# Altium PCB MINI-STM32.PcbDoc
Units mm, origin at the board's own origin, x right, y up, seen from the top; angles counter-clockwise.
Board outline 56.51 x 62.3 mm, 2 copper layers (Top Layer, Bottom Layer); 57 components, 64 nets, 295 pads, 204 vias.
Unrouted connection lines stored in the file: 1.
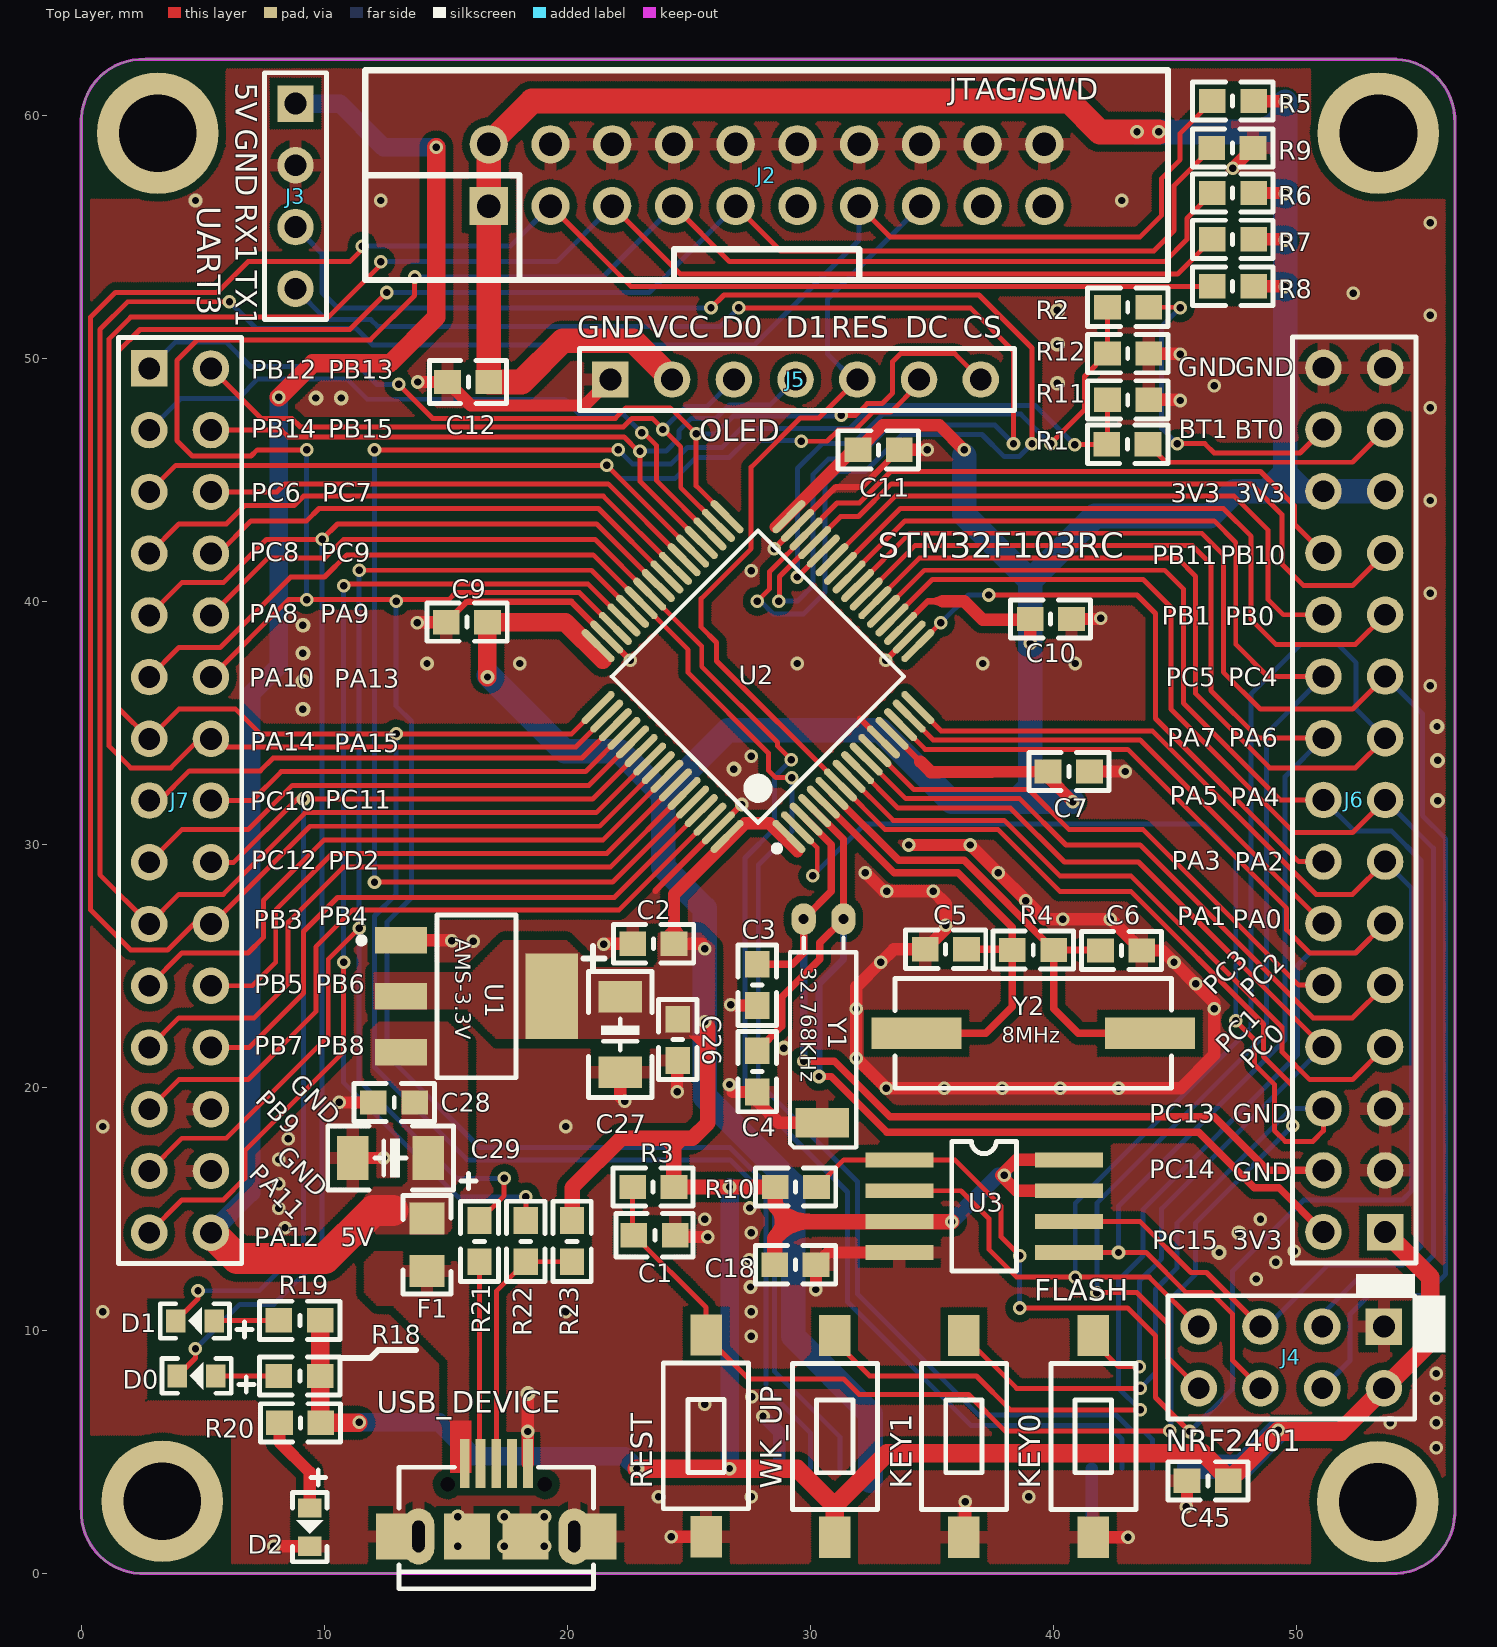
[diagram p0: Top Layer view]
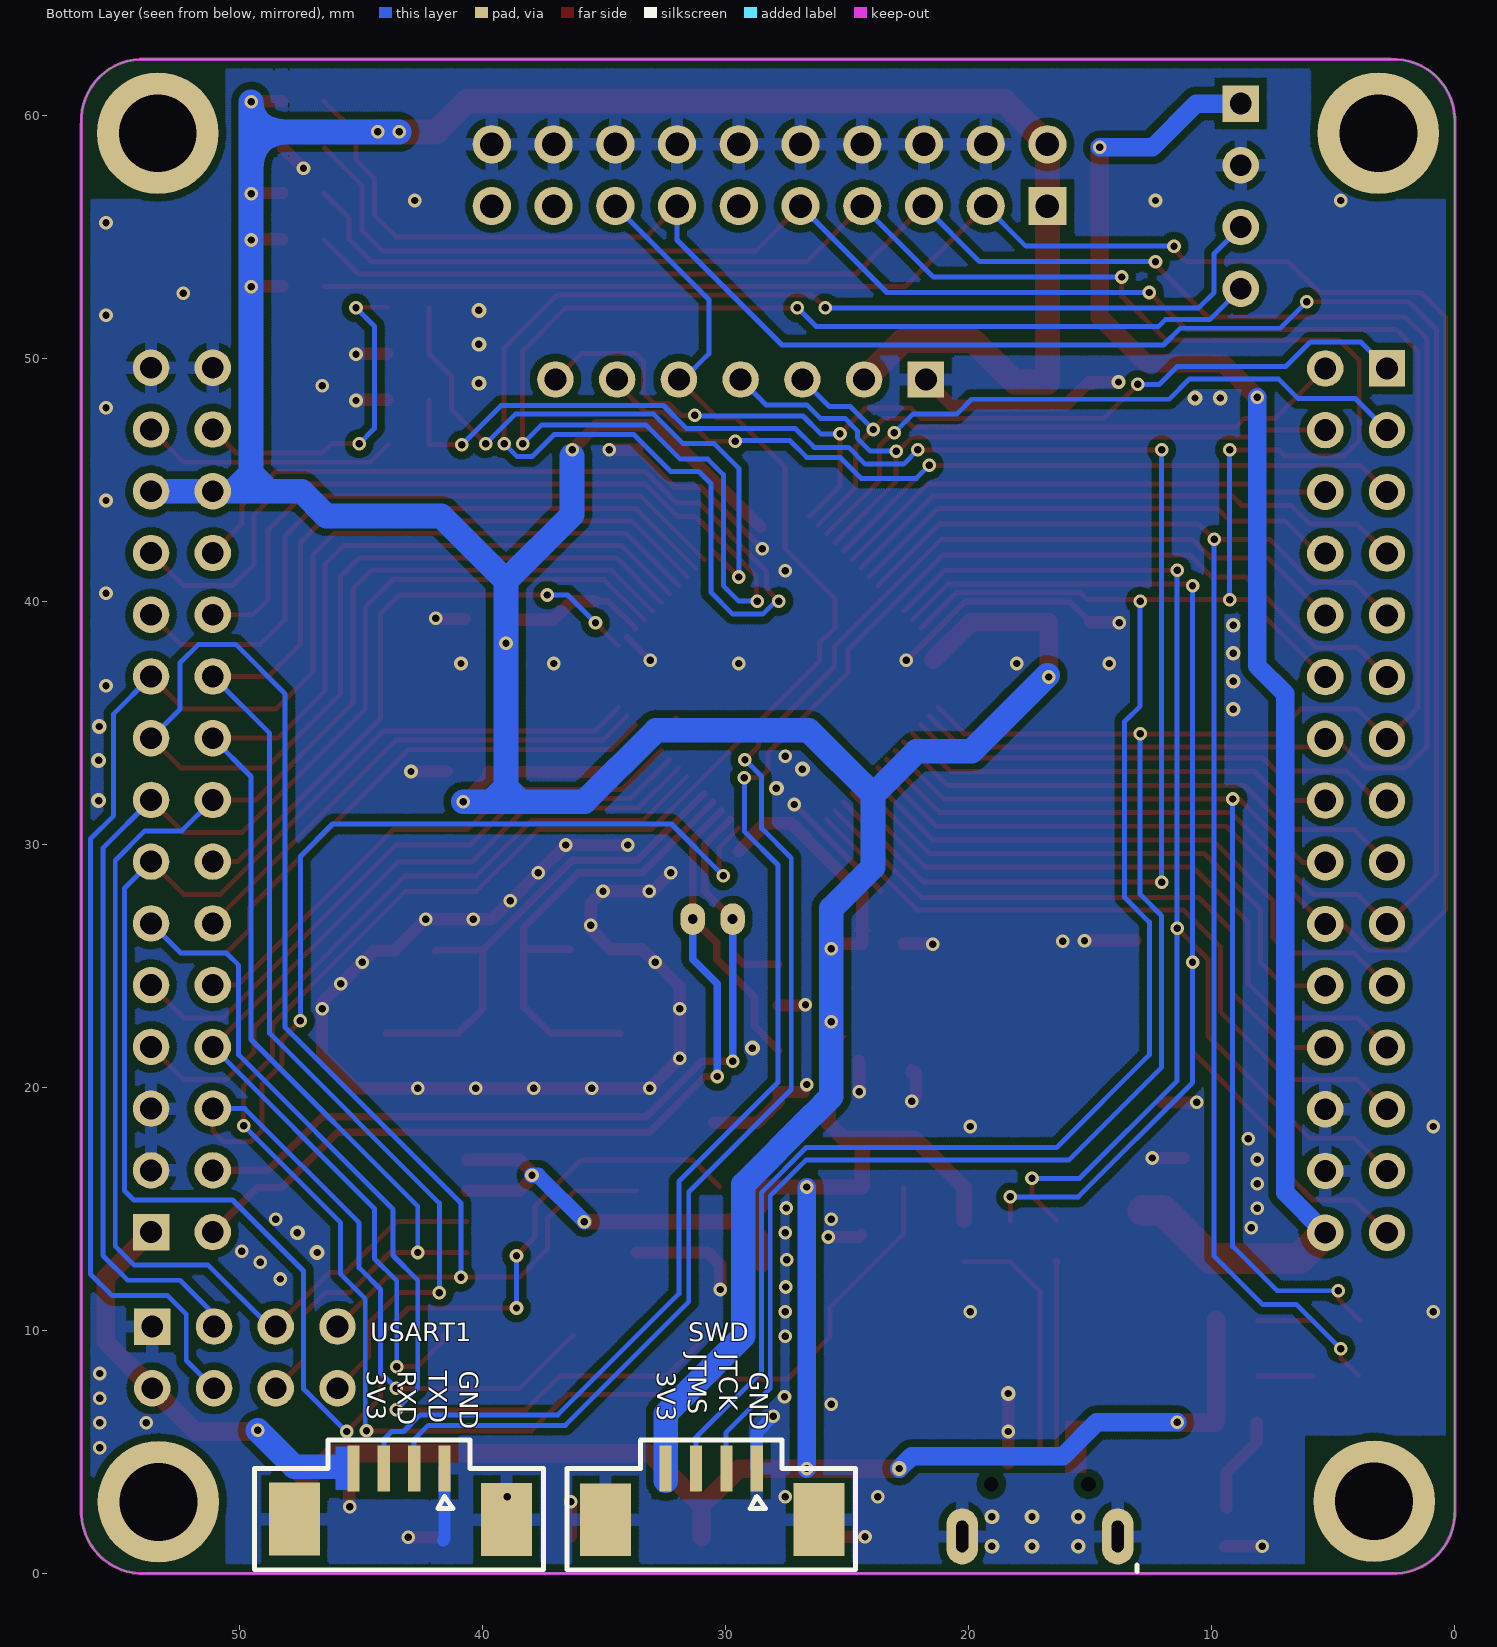
[diagram p1: Bottom Layer view, seen from below]

## Layer stack, top to bottom
Top Solder: solder mask 0.0102, Solder Resist, Dk 3.5
Top Layer: signal copper 0.0356
Dielectric1: core 0.32, FR-4, Dk 4.8
Bottom Layer: signal copper 0.0356
Bottom Solder: solder mask 0.0102, Solder Resist, Dk 3.5

## Board outline
0.004,2.635 ccw(c2.526,2.522) 2.413,0 53.873,0 ccw(c53.986,2.522) 56.508,2.409 56.515,2.409 56.515,59.664 56.511,59.664 ccw(c53.989,59.777) 54.102,62.298 2.642,62.298 ccw(c2.529,59.777) 0.007,59.889 0,59.889

## Design rules (kind name [scope] priority, off if disabled: settings)
Clearance Clearance_1 [InPoly] p1: gap=0.305 ignorepadtopadclearanceinfootprint=FALSE except(0: Arc-Hole Track-Hole SMDPad-Hole THPad-Hole Via-Hole Fill-Hole Poly-Hole Region-Hole Text-Hole)
Clearance [All] p2: gap=0.152 ignorepadtopadclearanceinfootprint=FALSE except(0: Arc-Hole Track-Hole SMDPad-Hole THPad-Hole Via-Hole Fill-Hole Poly-Hole Region-Hole Text-Hole)
ComponentClearance [All] p1: gap=0.025 collisioncheckmode=3 verticalgap=0.025 showdistances=FALSE
FabricationTestpoint [(IsPad And (OnTopLayer Or OnBottomLayer))] p1: side=3 testpointundercomponent=TRUE minsize=1.016 maxsize=2.54 preferedsize=1.524 minholesize=0 maxholesize=1.016 preferedholesize=0.813 testpointgrid=0.025 allowsidetop=TRUE allowsidebottom=TRUE usegrid=TRUE gridtolerance=0
MinimumSolderMaskSliver [All] p1: minsoldermaskwidth=0.025
PlaneConnect [All] p1: planeconnectstyle=Relief reliefexpansion=0.254 reliefentries=4 reliefconductorwidth=0.254 reliefairgap=0.254
PolygonConnect PolygonConnect_1 [isvia] p1: connectstyle=Direct reliefconductorwidth=0.254 reliefentries=4 polygonreliefangle="90 Angle" airgapwidth=0.254
PolygonConnect [All] p2: connectstyle=Relief reliefconductorwidth=0.508 reliefentries=4 polygonreliefangle="90 Angle" airgapwidth=0.254
RoutingVias [All] p1: holewidth=0.305 width=0.559 viastyle="Through Hole" minholewidth=0.305 minwidth=0.559 maxholewidth=0.305 maxwidth=0.559
SilkToSilkClearance [All] p1: silktosilkclearance=0.025
SilkToSolderMaskClearance SilkscreenOverComponentPads [IsPad] p1: minsilkscreentomaskgap=0.025 clearancetoexposedcopper=TRUE
SolderMaskExpansion [All] p1: expansion=0.064 istentingtop=FALSE
Width Width_2 [InNet('VCC3.3')  and InNet('VCC5')] p1: maxlimit=1.27 minlimit=0.254 preferedwidth=0.508
Width Width_1 [InNet('GND')] p2: maxlimit=0.508 minlimit=0.254 preferedwidth=0.508
Width [All] p3: maxlimit=1.524 minlimit=0.203 preferedwidth=0.203
24 further rules are at their usual default settings.

## Components (designator, comment, footprint, x,y, rotation, side; value= is the part's Value field where it differs from the comment)
C1 "104" 0603C 24.434,13.919 r180 top
C2 "104" 0603J 22.659,25.933 r0 top
C3 "12pF" 0603J 27.838,25.093 r270 top
C4 "12pF" 0603J 27.838,21.537 r270 top
C5 "20pF" 0603J 36.449,25.654 r180 top
C6 "20pF" 0603J 41.91,25.654 r0 top
C7 "104" 0603J 39.751,33.02 r0 top
C9 "104" 0603J 14.986,39.167 r0 top
C10 "104" 0603J 40.767,39.243 r180 top
C11 "104" 0603J 33.68,46.203 r180 top
C12 "104" 0603C 16.764,49.022 r180 top
C18 "104" 0603J 28.501,12.725 r0 top
C26 "104" 0603J 24.511,21.082 r90 top
C27 "106" TAC_3216 22.174,22.175 r270 top
C28 "104" 0603J 11.989,19.406 r0 top
C29 "106" TAC_3216 12.725,17.094 r180 top
C45 "104" 0603J 45.468,3.835 r0 top
D0 "DS0" LED_0603(B) 4.747,8.128 r180 top
D1 "DS1" LED_0603(B) 4.674,10.389 r180 top
D2 "PWR" LED_0603(B) 9.398,1.905 r270 top
F1 "500mA" RC0805 14.224,14.605 r270 top
J2 "10X2H" IDC20 16.764,56.261 r0 top
J3 "Header 4" HDR1X4 8.814,60.477 r270 top
J4 "NRF2401" HDR2X4 53.594,10.16 r180 top
J5 "OLED" HDR1X7 21.768,49.124 r0 top
J6 "Header 15X2" IDE15X2_2.54 53.645,14.046 r90 top
J7 "Header 15X2" IDE15X2_2.54 2.794,49.581 r270 top
KEY0 "SW-PB" "micro button_2_SMD" 41.631,5.639 r90 top
KEY1 "SW-PB" "micro button_2_SMD" 36.314,5.639 r90 top
R1 "510R" 0603J 42.164,46.482 r0 top
R2 "510R" 0603J 43.942,52.07 r180 top
R3 "10K" 0603J 24.409,15.875 r180 top
R4 "1M" 0603J 38.28,25.679 r0 top
R5 "10K" 0603J 48.26,60.554 r180 top
R6 "10K" 0603J 48.26,56.769 r180 top
R7 "10K" 0603J 48.26,54.864 r180 top
R8 "10K" 0603J 48.26,52.934 r180 top
R9 "10K" 0603J 46.482,58.674 r0 top
R10 "10K" 0603J 30.279,15.875 r180 top
R11 "10K" 0603J 43.942,48.26 r180 top
R12 "10K" 0603J 43.942,50.165 r180 top
R18 "510R" 0603J 8.103,8.153 r0 top
R19 "510R" 0603J 8.103,10.439 r0 top
R20 "510R" 0603J 8.128,6.223 r0 top
R21 "22R" 0603J 16.408,14.552 r270 top
R22 "22R" 0603J 18.313,14.552 r270 top
R23 "1.5K" 0603J 20.218,14.552 r270 top
REST "" "micro button_2_SMD" 25.705,5.664 r270 top
SWD "Comment" 1.25PWT-4P#1 28.722,4.318 r0 bottom
U1 "AMS1117-3.3" SOT223 16.256,23.749 r270 top
U2 "STM32F103RCT6" LQFP64 29.113,30.325 r135 top
U3 "W25X16" SOIC8P 34.163,17.018 r270 top
USART1 "Comment" 1.25PWT-4P#2 41.569,4.318 r0 bottom
USB_DEVICE "Comment" MicroUSB 17.075,-0.307 r180 top
WK_UP "WK_UP" "micro button_2_SMD" 30.996,5.639 r90 top
Y1 "32.768k" 32.768k 31.358,26.924 r180 top
Y2 "8MHz" smt-xtal 34.417,22.225 r0 top

## Footprints (in the part's own frame and the unit in brackets; to place one, negate y for a bottom-side part, rotate by r counter-clockwise, add the part's x,y. Pads: shape width x height; smd on the part's side, far side on the other; paste and mask are expansions set on the pad)
1.25PWT-4P#1 [mm]
  rect 2.1x3 smd: 0(-2.55,2.1) 0(6.228,2.108)
  rect 0.5x1.905 smd: 1(0,0) 2(1.25,0) 3(2.5,0) 4(3.75,0)
  silkscreen extent -4.06,-1.17 7.81,4.17, body extent -3.14,-0.74 7.01,3.86, height 3.43
1.25PWT-4P#2 [mm]
  rect 2.1x3 smd: 0(-2.55,2.1) 0(6.183,2.083)
  rect 0.5x1.905 smd: 1(0,0) 2(1.25,0) 3(2.5,0) 4(3.75,0)
  silkscreen extent -4.06,-1.17 7.81,4.17, body extent -3.14,-0.74 7.01,3.86, height 3.43
32.768k [mm]
  oval 1x1.3 hole 0.4: 1(0,0) 2(1.64,0)
  rect 2.2x1.2 smd: 3(0.875,8.382)
  silkscreen extent -0.53,0.76 2.2,9.4
0603C [mm] "for capicty only"
  rect 1.1x1 smd: 1(0,0) 2(1.7,0)
  silkscreen extent -0.74,-0.89 2.44,0.89
0603J [mm]
  rect 1.1x1 smd: 1(1.725,-0.025) 2(0.025,-0.025)
  silkscreen extent -0.76,-0.81 2.54,0.76
HDR1X4 [mm] "Connector; Header; 4 Position"
  rect 1.5x1.5 hole 0.9: 1(0,0)
  round 1.5 hole 0.9: 2(2.54,0) 3(5.08,0) 4(7.62,0)
  silkscreen extent -1.27,-1.27 8.89,1.27
HDR1X7 [mm] "Connector; Header; 8 Position"
  rect 1.5x1.5 hole 0.9: 1(0,0)
  round 1.5 hole 0.9: 2(2.54,0) 3(5.08,0) 4(7.62,0) 5(10.16,0) 6(12.7,0) 7(15.24,0)
  silkscreen extent -1.27,-1.27 16.64,1.27
HDR2X4 [mm] "Connector; Header; 4x2 Position"
  rect 1.5x1.5 hole 0.9: 1(0,0)
  round 1.5 hole 0.9: 2(0,2.54) 3(2.54,0) 4(2.54,2.54) 5(5.08,0) 6(5.08,2.54) 7(7.62,0) 8(7.62,2.54)
  silkscreen extent -1.27,-1.27 8.89,3.81
IDC20 [mil]
  rect 62x62 hole 38: 1(0,0)
  round 62 hole 38: 2(0,100) 3(100,0) 4(100,100) 5(200,0) 6(200,100) 7(300,0) 8(300,100) 9(400,0) 10(400,100) 11(500,0) 12(500,100) 13(600,0) 14(600,100) 15(700,0) 16(700,100) 17(800,0) 18(800,100) 19(900,0) 20(900,100)
  silkscreen extent -200,-120 1100,220
IDE15X2_2.54 [mm]
  rect 1.5x1.5 hole 0.9: 1(0,0)
  round 1.5 hole 0.9: 2(0,2.54) 3(2.54,0) 4(2.54,2.54) 5(5.08,0) 6(5.08,2.54) 7(7.62,0) 8(7.62,2.54) 9(10.16,0) 10(10.16,2.54) 11(12.7,0) 12(12.7,2.54) 13(15.24,0) 14(15.24,2.54) 15(17.78,0) 16(17.78,2.54) 17(20.32,0) 18(20.32,2.54) 19(22.86,0) 20(22.86,2.54) 21(25.4,0) 22(25.4,2.54) 23(27.94,0) 24(27.94,2.54) 25(30.48,0) 26(30.48,2.54) 27(33.02,0) 28(33.02,2.54) 29(35.56,0) 30(35.56,2.54)
  silkscreen extent -1.27,-1.27 36.83,3.81
LED_0603(B) [mm]
  rect 0.8x0.96 smd: 1(-0.79,0) 2(0.79,0)
  silkscreen extent -2.35,-0.71 1.42,0.71, body extent -0.81,-0.4 0.81,0.4, height 0.6
LQFP64 [mm] "SOT-223/SC-73; 4 Leads; Body 6.7 x 7.3 mm, inc. leads (LxW max)"
  oval 1.8x0.3 smd: 1(0,0) 2(0,-0.5) 3(0,-1) 4(0,-1.5) 5(0,-2) 6(0,-2.5) 7(0,-3) 8(0,-3.5) 9(0,-4) 10(0,-4.5) 11(0,-5) 12(0,-5.5) 13(0,-6) 14(0,-6.5) 15(0,-7) 16(0,-7.5) 33(11.1,-7.5) 34(11.1,-7) 35(11.1,-6.5) 36(11.1,-6) 37(11.1,-5.5) 38(11.1,-5) 39(11.1,-4.5) 40(11.1,-4) 41(11.1,-3.5) 42(11.1,-3) 43(11.1,-2.5) 44(11.1,-2) 45(11.1,-1.5) 46(11.1,-1) 47(11.1,-0.5) 48(11.1,0)
  oval 0.3x1.8 smd: 17(1.8,-9.3) 18(2.3,-9.3) 19(2.8,-9.3) 20(3.3,-9.3) 21(3.8,-9.3) 22(4.3,-9.3) 23(4.8,-9.3) 24(5.3,-9.3) 25(5.8,-9.3) 26(6.3,-9.3) 27(6.8,-9.3) 28(7.3,-9.3) 29(7.8,-9.3) 30(8.3,-9.3) 31(8.8,-9.3) 32(9.3,-9.3) 49(9.3,1.8) 50(8.8,1.8) 51(8.3,1.8) 52(7.8,1.8) 53(7.3,1.8) 54(6.8,1.8) 55(6.3,1.8) 56(5.8,1.8) 57(5.3,1.8) 58(4.8,1.8) 59(4.3,1.8) 60(3.8,1.8) 61(3.3,1.8) 62(2.8,1.8) 63(2.3,1.8) 64(1.8,1.8)
  silkscreen extent -0.12,-8 9.8,0.82, body extent 0.55,-8.75 10.55,1.25, height 1.6
"micro button_2_SMD" [mm]
  rect 1.7x1.3 smd: 1(-4.15,0) 2(4.15,0)
  silkscreen extent -3,-1.76 3,1.74, body extent -4.5,-1.75 4.5,1.75, height 4.51
MicroUSB [mm]
  round 0.3 hole 0.6: 0(-2,-3.981) 0(2,-3.981)
  rect 0.4x2 smd: 1(-1.3,-4.831) 2(-0.65,-4.831) 3(0,-4.831) 4(0.65,-4.831) 5(1.3,-4.831)
  rect 1.9x1.9 smd: 6(-4,-1.831) 6(-1.2,-1.831) 6(1.2,-1.831) 6(4,-1.831)
  oval 1.3x2.3 hole 0.5 slot 1.3 at 90 deg: 6(-3.2,-1.831) 6(3.2,-1.831)
  silkscreen extent -4,-4.68 4,0.32
RC0805 [mil]
  rect 52x56 smd: 1(0,0) 2(85,0)
  silkscreen extent -37,-39 122,39
smt-xtal [mil]
  rect 146x51 smd: 1(-2,0) 2(376,0)
  silkscreen extent -37,-89 411,89
SOIC8P [mil]
  rect 24x110 smd: 1(0,-20) 2(50,-20) 3(100,-20) 4(150,-20) 5(150,255) 6(100,255) 7(50,255) 8(0,255)
  silkscreen extent -30,65 180,170
SOT223 [mm] "SOT-223/SC-73; 4 Leads; Body 6.7 x 7.3 mm, inc. leads (LxW max)"
  rect 1.1x2.15 smd: 1(-2.3,-3.1) 2(0,-3.1) 3(2.3,-3.1)
  rect 3.5x2.15 smd: 4(0,3.1)
  silkscreen extent -3.35,-4.85 3.35,1.63
TAC_3216 [mm]
  rect 1.3x1.8 smd: 1(-1.55,0) 2(1.55,0)
  silkscreen extent -2.59,-1.31 2.59,1.31, body extent -1.75,-0.8 1.75,0.8, height 1.6

## Part data
C1 C12: library part CAP, "GRM39 X7R102K50PT"
C2 C7 C9 C10 C11 C18 C45: library part CAP
C3 C4 C5 C6: library part CAP, "CAP CHIP 20P 50V(+-5% C0G 0603)"
C26: library part Cap, "Capacitor"
C27 C29: library part "CAPACITOR POL", "Capacitor"
C28: library part CAP, "Capacitor"
D0 D1 D2: library part LED
F1 R1 R2 R3 R4 R5 R6 R7 R8 R9 R10 R11 R12 R18 R19 R20 R21 R22 R23: library part RES
J2: library part "Header 10X2H", "Header, 10-Pin, Dual row, Right Angle"
J3: "Header, 4-Pin"
J4: library part "HEADER 8", "8 Pin Header"
J5: library part "Header 7", "Header, 7-Pin"
J6 J7: "Header, 15-Pin, Dual row"
REST WK_UP: library part SW-PB
SWD USART1: library part "Header 4", "Header, 4-Pin"
U1: library part LT1085CM-3.3
U2: library part STM32F103RBT6
Y1 Y2: library part CRYSTAL, "Crystal 8MHz PLUG"

## Free pads (board coordinates)
  round 5 hole 3.2: ""(3.15,59.258) ""(3.327,2.972) ""(53.34,2.946) ""(53.365,59.258)

## Via types
v1: diameter 0.559, hole 0.305, Top Layer to Bottom Layer, tented both sides, 179 vias
v2: diameter 0.61, hole 0.305, Top Layer to Bottom Layer, tented both sides, 25 vias

## Nets (pads, with @x,y where several pads share a name; then routed paths per layer and width w, separated by ;. In a path a pad name is that pad's centre, name@x,y a point inside that pad or via, vN(x,y) a via of type N, cw(c..) or ccw(c..) an arc to the next point about the centre after c; other vN are vias at no path point)
BOOT0: R1.2 R11.1 U2.60 | length 66.1
  Top Layer w0.203: v1(12.065,28.448) 21.862,28.448 U2.60 ; v1(12.065,46.228) v1(22.098,46.228) ; v1@40.892,46.457 R1.2 42.217,46.484 R11.1
  Bottom Layer w0.203: v1(12.065,28.448) v1(12.065,46.228) ; v1(22.098,46.228) 22.682,45.644 24.257,45.644 24.943,46.33 26.365,46.33 27.153,47.117 31.623,47.117 32.563,48.057 39.241,48.057 v1(40.867,46.431)
BOOT1: R2.1 R12.1 U2.28 | length 24.4
  Top Layer w0.203: v1(29.464,41) U2.28 ; v1(39.878,46.482) 41.275,47.879 41.275,49.249 R12.1 R2.1
  Bottom Layer w0.203: v1(29.464,41) 29.464,45.466 30.48,46.482 31.75,46.482 32.969,47.701 38.659,47.701 v1(39.878,46.482)
CS: J5.7 J7.1 U2.33 | length 43.1
  Top Layer w0.203: v1(13.055,48.92) 14.452,47.523 21.971,47.523 22.403,47.955 24.232,47.955 v1(25.298,46.888) 25.298,44.746 U2.33 ; v1(31.267,47.65) 31.852,47.65 32.334,48.133 32.944,48.133 33.376,48.565 33.376,49.86 33.706,50.19 35.941,50.19 J5.7
  Bottom Layer w0.203: J7.1 3.886,50.673 5.944,50.673 6.96,49.657 11.43,49.657 12.167,48.92 v1(13.055,48.92) ; v1(25.298,46.888) 26.086,46.888 26.822,47.625 v1@31.293,47.625
DC: J5.6 J7.5 U2.37 | length 39.2
  Top Layer w0.203: J7.5 3.886,45.593 v1(21.623,45.593) U2.37 ; v1(29.616,46.584) 30.683,46.584 31.14,47.041 31.826,47.041 32.563,47.777 33.299,47.777 34.468,48.946 J5.6
  Bottom Layer w0.203: v1(21.623,45.593) 22.156,45.06 24.435,45.06 25.298,45.923 26.67,45.923 27.356,46.609 29.642,46.609 v1(29.616,46.584)
F_CS: J6.13 R10.2 U2.16 U3.1 | length 77
  Top Layer w0.203: R10.2 31.371,17.018 U3.1 35.941,17.018 37.846,15.113 37.846,13.843 v1(38.608,13.081) ; U2.16 35.373,34.671 44.069,34.671 50.8,27.94 52.299,27.94 J6.13 ; v1(38.608,10.922) 43.053,10.922 44.196,9.779 44.196,7.239 v1(45.593,5.842)
  Bottom Layer w0.203: v1(38.608,10.922) v1(38.608,13.081) ; v1(45.593,5.842) 45.616,5.842 47.371,7.597 47.371,12.446 50.292,15.367 54.356,15.367 54.737,15.748 54.737,28.194 J6.13
GND: C1.1 C2.2 C3.1 C4.1 C5.1 C6.1 C7.1 C9.2 C10.2 C11.2 C12.2 C18.1 C26.2 C27.2 C28.2 C29.2 C45.2 D2.2 J2.4 J2.6 J2.8 J2.10 J2.12 J2.14 J2.16 J2.18 J2.20 J3.2 J4.1 J5.1 J6.3 J6.5 J6.29 J6.30 J7.26 J7.28 KEY0.1 KEY1.1 R9.1 R11.2 R12.2 REST.2 SWD.0 SWD.1 U1.1 U2.12 U2.18 U2.31 U2.47 U2.63 U3.4 USART1.0 USART1.1 USB_DEVICE.1 USB_DEVICE.6 Y1.3 | length 122.1
  Top Layer w0.254: C9.2 15.85,39.98 20.165,39.98 U2.47 v1(22.578,37.567) ; 23.622,28.087 U2.63 v1(27.174,31.639) ; v1(28.506,42.163) U2.31 31.047,44.704 32.131,44.704 C11.2 ; 32.041,35.175 U2.12 ; v1(33.102,37.567) U2.18
  Top Layer w0.508: v1(7.925,1.118) D2.2@9.449,1.118 ; v1(10.617,19.38) C28.2 ; C29.2 v1(12.445,17.094) ; U1.1 15.226,26.049 v1(15.24,26.035) ; v1@13.79,39.141 C9.2 ; v1(13.843,49.022) 14.908,49.022 14.986,48.944 C12.2 16.029,48.057 20.701,48.057 J5.1 ; USB_DEVICE.1 v1(18.375,5.842) v2(18.375,7.405) ; v1@21.463,25.908 C2.2 ; C27.2 22.174,19.609 v1(22.352,19.431) ; C27.2@22.352,20.625 C27.2@22.352,20.701 ; v1(24.272,1.514) REST.2 ; C1.1 24.51,13.843 v1(25.781,13.843) ; v1(24.511,19.812) 24.511,21.082 C26.2 ; 26.797,19.812 C4.1 27.813,19.431 28.702,18.542 Y1.3 ; v1@26.797,23.368 C3.1 ; v1(30.226,11.684) C18.1 30.734,13.208 U3.4 ; v1(32.258,28.829) 33.02,28.067 v1(33.147,28.067) v1(35.052,28.067) 35.56,27.559 v1(35.56,26.67) 35.56,26.516 C5.1 33.426,25.679 v1(32.893,25.146) 31.888,24.141 v1(31.888,23.241) v1(31.888,21.198) v1(33.122,19.964) v1(35.509,19.964) v1(37.897,19.964) v1(40.284,19.964) v1(42.672,19.964) 45.237,19.964 46.609,21.336 v1(46.609,23.241) 46.609,23.495 v1(45.847,24.257) v1(44.958,25.146) 44.475,25.629 C6.1 v1(42.34,26.924) v1(40.386,26.924) 39.624,26.924 v1(38.862,27.686) v1(37.719,28.829) v1(36.576,29.972) v1(34.036,29.972) ; C11.2 v1(34.798,46.228) ; KEY1.1@36.369,1.524 v1(36.369,2.957) ; C10.2 v1@41.963,39.268 ; C7.1 v1(42.951,32.995) ; KEY0.1 v1(43.063,1.489) ; R11.2 v1@45.187,48.285 ; R12.2 v1@45.187,50.19 ; v1@45.493,2.743 C45.2 ; v1(47.371,57.812) R9.1
  Bottom Layer w0.508: v1(28.047,6.477) 28.722,5.802 SWD.1 ; USART1.1 41.569,1.423 41.631,1.361
  other v1: 45.466,2.743 23.749,3.15 27.559,3.15 38.989,3.15 55.753,5.182 53.848,6.198 55.753,6.198 25.654,6.96 55.753,7.214 27.584,7.264 55.753,8.23 27.559,9.754 0.889,10.77 19.939,10.77 27.559,10.77 27.534,11.786 48.336,12.116 49.149,12.802 27.483,12.903 49.911,13.259 27.559,14.021 8.382,14.224 25.654,14.58 48.514,14.58 8.128,15.034 27.508,15.037 8.128,16.034 8.128,17.034 8.509,17.882 0.889,18.39 19.939,18.39 26.67,20.117 26.721,23.393 21.488,25.883 16.129,26.01 27.559,33.63 55.499,36.525 14.224,37.44 18.034,37.44 29.464,37.44 37.084,37.44 40.894,37.44 13.816,39.116 41.937,39.294 55.499,40.335 27.559,41.25 55.499,44.145 55.499,47.955 45.212,48.26 46.609,48.87 45.212,50.165 55.499,51.765 52.324,52.68 55.499,55.575 4.699,56.49 12.319,56.49 42.799,56.49
  other v2: 15.494,1.118 17.399,1.118 19.05,1.118 15.494,2.337 17.399,2.337 19.05,2.337 46.812,13.208 47.625,14.021 28.905,21.615 55.804,31.801 27.915,32.309 26.848,33.096 55.804,33.452 55.778,34.849 9.119,35.56 9.119,36.711 9.119,37.863 9.119,39.014 9.652,48.362 10.693,48.362 40.157,48.971 40.157,50.571 40.157,51.968
JTCK/SWCLK: J2.9 J7.13 R9.2 SWD.2 U2.49 | length 131.7
  Top Layer w0.203: v1(12.573,52.705) 11.049,51.181 2.413,51.181 1.524,50.292 1.524,35.611 J7.13 4.013,35.56 6.35,35.56 7.366,34.544 v1(12.954,34.544) 20.18,34.544 U2.49 ; J2.9 28.765,54.419 44.133,54.419 44.958,55.245 44.958,57.099 R9.2
  Bottom Layer w0.203: v1(12.573,52.705) 23.368,52.705 J2.9 ; v1(12.954,34.544) 12.954,27.94 12.065,27.051 12.065,20.828 15.875,17.018 26.69,17.018 28.169,15.539 28.169,7.62 29.997,5.791 29.997,4.343 SWD.2
JTDI/PA15: J2.5 J7.14 R7.1 U2.50 | length 88.2
  Top Layer w0.203: J7.14@5.385,34.11 5.484,34.011 20.353,34.011 U2.50 ; J7.14@5.385,34.29 J7.14 4.877,34.341 3.683,33.147 2.032,33.147 1.143,34.036 1.143,50.8 2.032,51.689 10.16,51.689 12.319,53.848 v1(12.319,53.975) ; J2.5 24.638,53.467 45.112,53.467 R7.1
  Bottom Layer w0.203: v1(12.319,53.975) 19.558,53.975 J2.5
JTDO/PB3: J2.13 J7.19 R5.1 U2.55 | length 103.2
  Top Layer w0.203: v1(6.096,52.324) 1.905,52.324 0.762,51.181 0.762,28.753 J7.19 4.013,27.94 5.842,27.94 9.207,31.305 21.184,31.305 U2.55 ; J2.13 33.274,54.991 43.561,54.991 44.45,55.88 44.45,57.404 45.212,58.166 45.212,59.256 R5.1
  Bottom Layer w0.203: v1(6.096,52.324) 7.188,51.232 11.303,51.232 11.989,50.546 27.686,50.546 32.004,54.864 J2.13
JTMS/SWDIO: J2.7 J7.12 R6.1 SWD.3 U2.46 | length 132.5
  Top Layer w0.203: J7.12 8.522,40.069 v1(9.271,40.069) v1@13.018,40.069 ; v1(9.271,46.228) 7.239,46.228 6.985,45.974 4.572,45.974 3.937,46.609 3.937,49.911 4.779,50.753 11.891,50.753 13.716,52.578 v1(13.716,53.34) ; v1(12.954,40.005) v1@13.018,40.069 ; U2.46 20.492,40.361 15.418,40.361 15.126,40.069 v1@13.018,40.069 ; J2.7 26.67,53.975 44.577,53.975 45.493,54.891 45.493,55.753 R6.1
  Bottom Layer w0.203: v1(9.271,40.069) v1(9.271,46.228) ; v1@12.954,40.132 v1(12.954,40.005) 12.954,35.687 13.589,35.052 13.589,27.813 12.573,26.797 12.573,21.336 16.383,17.526 26.685,17.526 28.524,15.686 28.524,8.306 31.222,5.608 SWD.3 ; v1(13.716,53.34) 21.463,53.34 J2.7
JTRST/PB4: J2.3 J7.20 R8.1 U2.56 | length 101
  Top Layer w0.203: v1(11.557,54.61) 11.557,54.483 11.049,53.975 6.858,53.975 5.588,52.705 1.397,52.705 0.381,51.689 0.381,27.305 2.032,25.654 3.556,25.654 4.623,26.721 J7.20 5.385,26.721 9.409,30.745 21.33,30.745 U2.56 ; J2.3 22.606,52.959 R8.1
  Bottom Layer w0.203: v1(11.557,54.61) 17.653,54.61 J2.3
KEY0: J6.8 KEY0.2 U2.9 | length 42.8
  Top Layer w0.203: U2.9 33.599,31.496 38.227,31.496 40.45,29.273 43.497,29.273 J6.8 ; KEY0.2@41.631,9.794 41.631,9.55 42.672,8.509 v1(43.536,8.509)
  Bottom Layer w0.203: v1(43.536,8.509) 43.536,12.04 44.45,12.954 44.45,15.011 J6.8
KEY1: J6.6 KEY1.2 U2.2 | length 60.1
  Top Layer w0.203: U2.2 30.28,29.865 30.28,28.883 v1(30.099,28.702) ; KEY1.2@36.246,9.794 KEY1.2@36.282,9.758 ; KEY1.2 38.482,7.62 v1(43.561,7.62) ; v1(47.498,22.733) 48.26,21.971 48.26,20.955 49.085,20.13 49.085,18.224 49.53,17.78 50.673,17.78 51.105,18.212 J6.6
  Bottom Layer w0.203: v1(30.099,28.702) 32.233,30.836 46.177,30.836 47.498,29.515 v1(47.498,22.733) ; v1(43.561,7.62) 44.196,8.255 44.196,11.684 45.085,12.573 45.085,14.427 49.784,19.126 J6.6
LED0: D0.2 J7.9 U2.41 | length 61.3
  Top Layer w0.203: J7.9 4.14,40.767 5.842,40.767 7.62,42.545 v1(9.906,42.545) 10.541,43.18 21.208,43.18 U2.41 ; D0.2 4.697,8.868 v1(4.697,9.246)
  Bottom Layer w0.203: v1(4.697,9.246) 6.526,11.074 7.925,11.074 9.906,13.056 v1(9.906,42.545)
LED1: D1.2 J7.18 U2.54 | length 44.7
  Top Layer w0.203: D1.2 4.801,11.306 v1(4.801,11.633) ; J7.18 6.274,29.261 8.879,31.866 v1(9.144,31.866) 21.038,31.866 U2.54
  Bottom Layer w0.203: v1(4.801,11.633) 7.315,11.633 9.144,13.462 v1(9.144,31.866)
NetD0_1: D0.1 R18.2 | length 2.3
  Top Layer w0.203: D0.1@5.817,8.128 R18.2
NetD1_1: D1.1 R19.2 | length 2.3
  Top Layer w0.203: D1.1@5.844,10.414 R19.2
NetD2_1: D2.1 R20.2 | length 4
  Top Layer w0.508: R20.2 8.153,5.41 9.398,4.166 D2.1
NetF1_2: F1.2 USB_DEVICE.5
NetJ1_2: R21.1 USB_DEVICE.4 | length 8.3
  Top Layer w0.203: R21.1 16.383,4.566 USB_DEVICE.4
  Top Layer w0.305: R21.1 R21.1@16.396,12.814
NetJ1_3: R22.1 R23.1 USB_DEVICE.3 | length 10.7
  Top Layer w0.203: USB_DEVICE.3 17.075,11.614 R22.1 R23.1
NetJ6_27: J6.27 R1.1 | length 10.6
  Top Layer w0.203: R1.1 44.626,45.72 52.299,45.72 J6.27
NetJ6_28: J6.28 R2.2 | length 14
  Top Layer w0.203: R2.2 v1@45.212,52.095 ; v1(45.085,46.482) 46.228,46.482 46.609,46.101 50.14,46.101 J6.28
  Bottom Layer w0.203: v1(45.085,46.482) 44.45,47.117 44.45,51.308 v1(45.212,52.07)
NRF_CE: J4.3 J6.15 U2.20 | length 53.9
  Top Layer w0.203: U2.20 35.015,40.894 43.688,40.894 44.831,39.751 44.831,35.56 49.911,30.48 52.299,30.48 J6.15
  Bottom Layer w0.203: J4.3 51.054,10.668 52.451,12.065 54.61,12.065 55.626,13.081 55.626,29.845 J6.15
NRF_CS: J4.4 J6.19 U2.24 | length 62.7
  Top Layer w0.203: U2.24 34.091,42.799 46.101,42.799 46.99,41.91 46.99,37.084 48.514,35.56 52.299,35.56 J6.19
  Bottom Layer w0.203: J4.4 52.197,8.763 52.197,10.668 52.959,11.43 55.245,11.43 56.134,12.319 56.134,30.226 55.181,31.178 55.181,35.369 J6.19
NRF_IRQ: J4.8 J6.20 U2.25 | length 61.4
  Top Layer w0.203: U2.25 33.892,43.307 46.609,43.307 47.498,42.418 47.498,38.227 48.819,36.906 J6.20 ; v1(41.783,11.557) 43.434,11.557 44.704,10.287 44.704,8.89 J4.8
  Bottom Layer w0.203: v1(41.783,11.557) 41.783,15.24 48.768,22.225 48.768,34.569 J6.20
OSC_IN1: C3.2 J6.4 U2.3 Y1.2 | length 37.6
  Top Layer w0.203: Y1.2 Y1.2@29.781,26.987
  Top Layer w0.305: C3.2 29.259,25.068 29.718,25.527 Y1.2 ; v1(29.718,21.082) 30.988,21.082 33.274,18.796 46.609,18.796 48.819,16.586 J6.4 ; Y1.2@29.781,26.987 30.861,28.067 30.861,29.991 U2.3
  Bottom Layer w0.305: v1(29.718,21.082) Y1.2
OSC_IN2: C5.2 R4.2 U2.5 Y2.1 | length 19.5
  Top Layer w0.305: U2.5 33.437,28.829 36.068,28.829 38.305,26.592 R4.2 ; Y2.1 37.211,22.225 38.305,23.319 R4.2 ; C5.2 38.28,25.679 R4.2
OSC_OUT1: C4.2 J6.2 U2.4 Y1.1 | length 42.1
  Top Layer w0.305: C4.2 28.811,22.51 28.811,23.706 30.378,25.273 30.378,25.944 Y1.1 31.358,30.201 U2.4 ; v1(30.353,20.447) 30.861,20.447 33.147,18.161 45.974,18.161 48.26,15.875 49.276,15.875 J6.2
  Bottom Layer w0.305: v1(30.353,20.447) 30.353,24.268 31.358,25.273 Y1.1
OSC_OUT2: C6.2 R4.1 U2.6 Y2.2 | length 20.5
  Top Layer w0.305: U2.6 33.636,29.337 36.322,29.337 R4.1 ; C6.2 41.91,25.654 R4.1 ; Y2.2 41.021,22.225 40.005,23.241 R4.1
PA0: J6.11 U2.14 WK_UP.2 | length 64.8
  Top Layer w0.203: WK_UP.2 30.996,9.567 32.436,8.128 36.83,8.128 38.227,6.731 v1(43.561,6.731) ; U2.14 34.721,33.909 43.053,33.909 49.593,27.368 49.593,26.479 50.546,25.527 52.426,25.527 J6.11
  Bottom Layer w0.203: v1(43.561,6.731) 42.672,7.62 42.672,12.065 43.688,13.081 43.688,14.986 50.038,21.336 50.038,25.019 50.546,25.527 52.426,25.527 J6.11
PA1: J6.12 U2.15 | length 20.6
  Top Layer w0.203: U2.15 35.047,34.29 43.561,34.29 J6.12
PA3: J6.14 U2.17 | length 24.6
  Top Layer w0.203: U2.17 v1(35.358,39.116) ; v1(37.338,40.259) 43.434,40.259 44.196,39.497 44.196,35.179 50.089,29.286 J6.14
  Bottom Layer w0.203: v1(35.358,39.116) 36.501,40.259 v1(37.338,40.259)
PA5: J4.5 J6.16 U2.21 U3.6 | length 64
  Top Layer w0.203: U2.21 34.689,41.275 44.577,41.275 45.339,40.513 45.339,35.814 49.327,31.826 J6.16 ; U3.6 43.561,14.478 45.657,12.382 46.291,12.382 J4.5
  Bottom Layer w0.203: J4.5 48.768,10.16 51.308,12.7 54.356,12.7 55.118,13.462 55.118,29.337 53.899,30.556 52.375,30.556 J6.16
PA6: J4.7 J6.17 U2.22 U3.2 | length 80.1
  Top Layer w0.203: U2.22 34.49,41.783 45.085,41.783 45.847,41.021 45.847,36.195 48.895,33.147 52.426,33.147 J6.17 ; U3.2 36.195,15.748 37.338,14.605 37.338,13.335 38.481,12.192 v1(40.894,12.192) 43.942,12.192 J4.7
  Bottom Layer w0.203: v1(40.894,12.192) 40.894,15.24 48.133,22.479 48.133,36.195 50.165,38.227 51.689,38.227 52.451,37.465 52.451,35.56 J6.17
PA7: J4.6 J6.18 U2.23 U3.5 | length 61.9
  Top Layer w0.203: U2.23 34.291,42.291 45.72,42.291 46.482,41.529 46.482,36.322 48.438,34.366 J6.18 ; U3.5 v1(42.672,13.208) 43.815,13.208 45.468,11.555 46.484,11.555 47.371,10.668 47.371,8.763 J4.6
  Bottom Layer w0.203: v1(42.672,13.208) 42.672,15.113 49.53,21.971 49.53,32.791 J6.18
PA9: J7.10 U2.42 USART1.2 | length 69.2
  Top Layer w0.203: J7.10 7.696,41.783 10.033,41.783 10.795,42.545 21.136,42.545 U2.42 25.527,38.154 25.527,37.313 28.651,34.188 28.651,34.036 v1(29.21,33.477)
  Bottom Layer w0.203: v1(29.21,33.477) 28.524,32.791 28.524,30.658 27.305,29.439 27.305,19.914 31.521,15.697 31.521,11.176 36.601,6.096 42.24,6.096 42.819,5.517 USART1.2
PA10: J7.11 U2.43 USART1.3 | length 72.6
  Top Layer w0.203: J7.11 4.013,38.1 5.715,38.1 8.611,40.996 10.008,40.996 10.922,41.91 21.063,41.91 U2.43 24.968,38.005 24.968,37.059 28.27,33.757 28.27,33.045 28.575,32.741 v1(29.235,32.741)
  Bottom Layer w0.203: v1(29.235,32.741) 29.235,30.531 27.851,29.146 27.851,20.206 31.928,16.129 31.928,11.506 36.906,6.528 42.57,6.528 43.256,5.842 43.739,5.842 44.069,5.512 USART1.3
PA11: J7.27 R21.2 U2.44 | length 57.4
  Top Layer w0.203: J7.27 4.14,17.907 5.969,17.907 10.16,22.098 10.16,25.273 v1(11.43,26.543) ; v1(11.43,41.275) 20.991,41.275 U2.44 ; R21.2 17.399,15.543 v1(17.399,16.256)
  Bottom Layer w0.203: v1(11.43,41.275) v1(11.43,26.543) 11.43,20.269 15.443,16.256 v1(17.399,16.256)
PA12: J7.29 R22.2 U2.45 | length 58.5
  Top Layer w0.203: J7.29 4.14,15.367 5.842,15.367 6.731,16.256 6.731,17.399 10.795,21.463 v1(10.795,25.146) ; v1(10.795,40.64) 10.871,40.716 20.843,40.716 U2.45 ; R22.2 v1(18.288,15.494)
  Bottom Layer w0.203: v1(10.795,40.64) v1(10.795,25.146) 10.795,20.193 15.494,15.494 v1(18.288,15.494)
PB0: J6.21 U2.26 | length 28.3
  Top Layer w0.203: U2.26 33.693,43.815 34.671,43.815 46.99,43.815 48.133,42.672 48.133,39.243 49.149,38.227 52.426,38.227 J6.21
PB1: J6.22 U2.27 | length 25
  Top Layer w0.203: U2.27 33.494,44.323 47.434,44.323 48.831,42.926 48.831,40.069 49.454,39.446 J6.22
PB5: J7.21 U2.57 | length 26.1
  Top Layer w0.203: J7.21 4.14,25.527 6.858,25.527 7.493,26.162 7.493,27.686 9.991,30.184 10.668,30.184 ; 10.287,30.184 10.668,30.184 ; U2.57 21.476,30.184 10.668,30.184
PB6: J7.22 U2.58 | length 23.9
  Top Layer w0.203: J7.22 7.036,24.181 8.001,25.146 8.001,27.305 10.319,29.623 10.668,29.623 ; 10.541,29.623 10.668,29.623 ; U2.58 21.622,29.623 10.668,29.623
PB7: J7.23 U2.59 | length 28.1
  Top Layer w0.203: J7.23 4.013,22.86 7.112,22.86 8.509,24.257 8.509,26.797 10.774,29.062 11.176,29.062 ; 10.922,29.062 11.176,29.062 ; U2.59 21.768,29.062 11.176,29.062
PB8: J7.24 U2.61 | length 25.7
  Top Layer w0.203: J7.24 6.909,21.641 9.144,23.876 9.144,26.416 10.541,27.813 21.934,27.813 U2.61
PB9: J7.25 U2.62 | length 29.6
  Top Layer w0.203: J7.25 4.013,20.32 6.858,20.32 9.652,23.114 9.652,25.781 11.176,27.305 22.133,27.305 U2.62
PB10: J3.4 J6.23 U2.29 | length 81.7
  Top Layer w0.203: v1(27.051,52.07) 36.576,52.07 38.354,50.292 v1(38.354,46.482) ; v1(28.702,40.005) 28.728,40.031 28.728,41.018 30.126,42.417 U2.29 31.242,43.485 31.979,43.485 33.325,44.831 48.133,44.831 49.403,43.561 49.403,41.529 50.292,40.64 52.299,40.64 J6.23
  Bottom Layer w0.203: J3.4 10.084,51.587 11.913,51.587 12.192,51.308 26.289,51.308 v1(27.051,52.07) ; v1(28.702,40.005) 29.464,40.005 30.099,40.64 30.099,45.212 30.734,45.847 31.877,45.847 33.274,47.244 37.592,47.244 v1(38.354,46.482)
PB11: J3.3 J6.24 U2.30 | length 83.4
  Top Layer w0.203: v1(25.908,52.07) 26.441,52.603 36.932,52.603 39.116,50.419 v1(39.116,46.482) v1@39.116,46.355 ; v1(27.813,40.005) 28.321,40.513 28.321,41.224 29.82,42.723 U2.30 31.093,44.044 32.009,44.044 33.305,45.339 48.514,45.339 49.911,43.942 49.911,43.18 J6.24
  Bottom Layer w0.203: J3.3 9.906,54.305 9.906,52.705 10.541,52.07 v1(25.908,52.07) ; v1(27.813,40.005) 27.948,40.005 28.481,39.472 29.705,39.472 30.607,40.373 30.607,44.831 31.115,45.339 32.258,45.339 33.782,46.863 37.059,46.863 37.973,45.949 38.583,45.949 v1(39.116,46.482)
PB13: J5.3 J7.2 U2.34 | length 28.6
  Top Layer w0.203: J7.2 7.391,47.523 8.661,47.523 9.017,47.168 22.301,47.168 22.657,47.523 23.495,47.523 24.663,46.355 24.663,44.674 U2.34
  Bottom Layer w0.203: v1(23.927,47.066) 24.867,48.006 25.73,48.006 J5.3
PB14: J7.3 U2.35 | length 27.4
  Top Layer w0.203: v1(23.063,46.939) 23.139,46.939 23.673,46.406 23.673,44.957 U2.35
  Bottom Layer w0.203: J7.3 4.089,48.336 6.452,48.336 7.264,49.149 10.922,49.149 11.76,48.311 19.888,48.311 20.498,47.701 22.301,47.701 v1(23.063,46.939)
PB15: J5.4 J7.4 U2.36 | length 30.6
  Top Layer w0.203: J7.4 8.23,47.041 8.509,46.761 22.327,46.761 22.911,46.177 v1(22.987,46.177) 22.987,44.936 U2.36
  Bottom Layer w0.203: v1(22.987,46.177) 24.054,46.177 24.587,46.711 24.587,47.015 25.095,47.523 26.111,47.523 26.67,48.082 28.346,48.082 J5.4
PC0: J6.7 U2.8 | length 28.4
  Top Layer w0.203: U2.8 33.4,30.988 37.973,30.988 40.259,28.702 43.18,28.702 49.403,22.479 49.403,21.463 50.546,20.32 52.299,20.32 J6.7
PC2: J6.9 U2.10 | length 26.3
  Top Layer w0.203: U2.10 33.925,31.877 38.608,31.877 40.513,29.972 43.561,29.972 50.673,22.86 52.299,22.86 J6.9
PC3: J6.10 U2.11 | length 22.5
  Top Layer w0.203: U2.11 34.251,32.258 38.989,32.258 40.64,30.607 43.688,30.607 50.089,24.206 J6.10
PC7: J7.6 U2.38 | length 20.9
  Top Layer w0.203: J7.6 8.052,44.501 8.382,44.831 21.678,44.831 U2.38
PC8: J7.7 U2.39 | length 23.9
  Top Layer w0.203: J7.7 4.013,43.18 5.969,43.18 6.731,43.942 8.763,43.942 9.144,44.323 21.479,44.323 U2.39
PC9: J7.8 U2.40 | length 20.7
  Top Layer w0.203: J7.8 5.639,41.961 6.985,43.307 9.271,43.307 9.779,43.815 21.28,43.815 U2.40
PC10: J7.15 U2.51 | length 20.5
  Top Layer w0.203: J7.15 3.226,31.801 4.445,33.02 7.366,33.02 7.895,33.549 8.255,33.549 8.763,33.549 20.599,33.549 U2.51
PC11: J7.16 U2.52 | length 18.8
  Top Layer w0.203: J7.16 7.036,31.801 8.223,32.988 9.398,32.988 ; 8.763,32.988 9.398,32.988 ; U2.52 20.745,32.988 9.398,32.988
PC12: J7.17 U2.53 | length 22.7
  Top Layer w0.203: J7.17 4.14,30.607 6.858,30.607 8.678,32.427 10.033,32.427 ; 9.271,32.427 10.033,32.427 ; U2.53 20.891,32.427 10.033,32.427
RESET: C1.2 J2.15 J5.5 R3.1 REST.1 U2.7 | length 100.3
  Top Layer w0.203: C1.2@22.684,13.919 R3.1 ; C1.2 25.705,10.948 REST.1 ; REST.1@25.705,9.754 27.457,8.001 31.369,8.001 32.004,7.366 36.5,7.366 37.998,5.867 v1(44.78,5.867) ; J5.5 30.353,47.549 29.591,47.549 27.559,45.517 27.559,42.164 25.502,40.107 25.502,38.938 26.137,38.303 26.137,37.544 U2.7 33.074,30.607 37.719,30.607 40.259,28.067 43.18,28.067 48.641,22.606 48.641,21.26 49.835,20.066 v1(49.835,18.415)
  Bottom Layer w0.203: J5.5 31.75,49.124 30.696,50.178 30.696,52.413 J2.15 ; v1(44.78,5.867) 44.831,5.918 44.831,11.303 45.847,12.319 45.847,14.427 v1(49.835,18.415)
VCC3.3: C2.1 C7.2 C9.1 C10.1 C11.1 C12.1 C18.2 C26.1 C27.1 C45.1 J2.1 J2.2 J4.2 J5.2 J6.1 J6.25 J6.26 R3.2 R5.2 R6.2 R7.2 R8.2 R10.1 R18.1 R19.1 R20.1 R23.2 SWD.4 U1.2 U1.4 U2.1 U2.13 U2.19 U2.32 U2.48 U2.64 U3.3 U3.7 U3.8 USART1.4 WK_UP.1 | length 327.9
  Top Layer w0.203: 19.914,39.141 20.296,39.141 U2.48
  Top Layer w0.254: U2.64 U2.64@27.103,30.861 ; 28.321,30.861 28.577,30.861 U2.1 ; U2.13 34.522,33.401 ; U2.19 34.833,40.005 35.433,40.005
  Top Layer w0.508: C9.1@16.711,38.887 C9.1 ; v1@25.527,25.908 C2.1 24.384,27.94 27.305,30.861 28.321,30.861 29.464,29.718 ; U2.32@28.575,43.053 31.75,46.228 C11.1@31.864,46.228 ; C11.1 32.971,47.244 35.306,47.244 v1(36.322,46.228) ; 34.522,33.401 34.954,32.969 35.281,32.969 C7.2 39.776,32.766 v1(40.792,31.75) ; 35.433,40.005 36.322,40.005 37.084,39.243 C10.1@38.889,39.243 ; v1(39.042,38.28) C10.1 ; U3.7 38.481,15.748 37.846,16.383 38.481,17.018 U3.8 ; R8.2 v1@49.505,52.959 ; R7.2 v1@49.505,54.889 ; R6.2 v1@49.505,56.794 ; R5.2 v1@49.505,60.579
  Top Layer w0.635: R23.2 20.193,15.875 22.225,17.907 25.146,17.907 25.781,18.542 25.781,22.454 ; 24.384,17.78 R3.2 v1(26.67,15.9) R10.1 28.553,15.135 29.21,14.478 ; C18.2 28.526,13.794 29.21,14.478 ; v1(35.814,14.478) U3.3 29.21,14.478
  Top Layer w0.762: R20.1@9.828,6.301 R18.1 R19.1 ; R20.1 v1@11.405,6.198 ; v1(16.711,36.883) C9.1@16.711,38.887 ; C9.1 19.914,39.141 21.461,37.594 ; v2(22.86,4.318) v1(26.67,4.318) 29.449,4.318 30.988,2.779 ; WK_UP.1 30.996,2.771 30.988,2.779 ; v1@49.225,5.842 C45.1 47.193,3.914 46.154,4.953 33.162,4.953 30.988,2.779 ; v1@49.251,5.842 51.816,5.842 J4.2 55.499,9.525 55.499,12.192 J6.1
  Top Layer w1.016: J5.2 22.708,50.724 19.812,50.724 18.11,49.022 C12.1 J2.1 J2.2 18.542,60.579 40.64,60.579 41.91,59.309 v1(43.434,59.309) v1(44.323,59.309)
  Bottom Layer w0.635: v1(35.814,14.478) 37.719,16.383 v1(37.973,16.383)
  Bottom Layer w0.762: v1(11.43,6.223) 14.732,6.223 16.129,4.826 22.352,4.826 v2(22.86,4.318) ; v1(26.67,4.318) v1(26.67,15.9)
  Bottom Layer w1.016: v1@16.764,36.957 19.888,33.833 22.149,33.833 23.939,32.042 ; SWD.4@32.472,3.81 SWD.4 32.472,6.579 29.286,9.764 29.286,16.002 26.416,18.872 26.408,18.872 25.654,19.626 v1(25.654,22.705) v1(25.654,25.705) 25.654,27.356 23.939,29.07 23.939,32.042 ; v1@36.322,45.974 36.322,43.561 39.042,40.841 ; v1(40.792,31.75) 39.243,31.75 ; v1(43.434,59.309) v1(44.323,59.309) 49.53,59.309 ; 45.593,4.396 47.753,4.396 v1(49.251,5.893) ; v1(49.53,60.554) 49.53,59.309 ; J6.25 49.657,44.526 ; 23.939,32.042 26.594,34.696 32.868,34.696 35.814,31.75 39.243,31.75 ; 39.042,40.841 41.709,43.508 46.429,43.508 47.447,44.526 49.657,44.526 ; 39.042,40.841 v1(39.042,38.28) 39.042,31.951 39.243,31.75 ; 49.53,59.309 v1(49.53,56.769) v1(49.53,54.864) v1(49.53,52.934) 49.53,44.653 49.657,44.526
VCC5: C28.1 C29.1 F1.1 J3.1 J7.30 U1.3 | length 65.8
  Top Layer w0.762: v1(8.128,48.387) 9.525,49.784 12.7,49.784 14.605,51.689 v1(14.605,58.674) ; J3.1 J3.1@8.992,60.477
  Top Layer w1.27: J7.30 6.401,12.954 10.033,12.954 12.014,14.935 12.827,14.935
  Bottom Layer w0.762: J7.30 6.985,15.672 6.985,36.195 8.128,37.338 v1(8.128,48.387) ; J3.1 10.643,60.477 12.446,58.674 v1(14.605,58.674)
pads on no net: J2.11 J2.17 J2.19 USB_DEVICE.0 USB_DEVICE.2

## Polygon pours and split planes (outlines as drawn)
GND on Top Layer "GND_L01_P028" (hatched 90Degree grid 0.102 track 0.127, remove dead copper, pour order 28): -0.025,62.662 56.134,62.662 56.49,62.306 56.49,-0.178 -0.152,-0.178 -0.508,0.178
VCC3.3 on Top Layer "VCC3.3_L01_P012" (hatched Horizontal grid 0.102 track 0.127, remove dead copper, pour order 26): 12.065,23.241 15.875,23.241 17.145,21.971 25.527,21.971 26.035,22.479 26.035,25.781 25.4,26.416 23.876,26.416 23.749,26.289 23.749,25.146 23.495,24.892 21.082,24.892 19.939,26.035 17.399,26.035 16.129,24.765 12.065,24.765
VCC5 on Top Layer "VCC5_L01_P006" (hatched Horizontal grid 0.102 track 0.127, remove dead copper, pour order 25): 12.192,13.97 11.684,14.478 11.684,15.494 12.065,15.875 13.208,15.875 13.462,16.129 13.462,18.161 13.208,18.415 13.208,19.812 12.7,20.32 12.192,20.32 11.938,20.574 11.938,22.352 12.319,22.733 14.986,22.733 15.875,21.844 15.875,16.51 15.215,15.85 15.215,14.199 14.986,13.97
NetF1_2 on Top Layer "NETF1_2_L01_P002" (hatched Horizontal grid 0.102 track 0.127, remove dead copper, pour order 23): 15.596,12.624 15.011,13.208 12.065,13.208 11.684,12.827 11.684,11.557 12.192,11.049 12.827,11.049 15.113,8.763 15.113,6.35 15.494,5.969 15.748,5.969 16.053,6.274 16.053,11.776 15.596,12.324
VCC5 on Top Layer "VCC5_L01_P004" (hatched Horizontal grid 0.102 track 0.127, remove dead copper, pour order 24): 11.557,13.97
GND on Bottom Layer "GND_L02_P021" (hatched 90Degree grid 0.102 track 0.127, remove dead copper, pour order 21): -0.025,62.662 56.134,62.662 56.49,62.306 56.49,-0.178 -0.152,-0.178 -0.508,0.178

## Keep-outs
Keep-Out Layer:
  lines w0.127: 0,2.635 0,59.889 ; 0.004,2.635 ccw(c2.526,2.522) 2.413,0 53.873,0 ccw(c53.986,2.522) 56.508,2.409 ; 0.007,59.889 cw(c2.529,59.777) 2.642,62.298 54.102,62.298 cw(c53.989,59.777) 56.511,59.664 ; 56.515,2.409 56.515,59.664

## Other copper
Top Layer:
  rectangle net NetF1_2: 15.164,4.14 16.053,6.299
  pour cut-out: 50.927,47.879 54.712,47.879 54.788,47.803 54.788,20.828 51.181,20.828 50.927,21.082
  pour cut-out: 47.117,61.163 47.371,60.909 47.371,59.491 47.426,59.436 47.299,59.309 46.482,59.309 46.482,58.826 47.117,58.191 47.117,57.379 48.235,56.261 49.022,56.261 49.153,56.13 49.153,52.222 45.974,52.222 45.974,57.582 46.355,57.963 46.355,61.163
  pour cut-out: 2.656,11.379 2.656,7.114 2.654,7.112 2.7,7.066 7.235,7.066 7.366,6.935 7.366,6.858 10.721,6.858 10.772,6.909 10.772,11.252 10.645,11.379
  pour cut-out: 18.796,15.367 19.609,15.367 19.685,15.443 19.685,11.989 18.923,11.989
  pour cut-out: 29.21,8.331 30.023,9.144 31.318,9.144 32.639,7.823 32.512,7.696 32.512,7.518 31.674,7.518 31.267,7.925 29.21,7.925
  pour cut-out: 33.147,33.934 33.604,33.934 34.417,33.122 35.128,33.122 35.433,32.817 35.433,32.626 34.29,32.626
  pour cut-out: 25.273,29.591 25.451,29.591 26.035,30.175 25.73,30.48 25.659,30.48 25.024,29.845 25.019,29.845
  pour cut-out: 20.066,39.726 20.269,39.726 21.082,38.913 21.387,39.218 21.412,39.218 20.701,39.929 20.066,39.929
  pour cut-out: 29.722,43.667 30.353,44.298 30.632,44.298 30.734,44.196 30.734,43.993 30.226,43.485 29.934,43.485
  region net VCC3.3: 24.384,27.025 24.384,26.797 24.003,26.416 24.765,26.416
  region net VCC3.3: 28.575,14.732 28.575,14.224 28.702,14.097 29.083,14.478 29.21,14.478
  region net VCC3.3: 25.019,22.149 25.019,22.098 25.781,21.336 25.781,22.098
  region net VCC3.3: 23.749,17.907 23.749,17.78 24.384,17.145 25.019,17.78
Bottom Layer:
  rectangle net VCC3.3: 45.415,3.429 46.05,5.232
  region net VCC3.3: 49.276,45.72 48.514,44.958 48.514,44.577 50.673,44.577 50.673,44.831 49.784,45.72
  pour cut-out: 26.213,19.837 27.407,19.837 31.521,15.723 31.521,15.697 31.344,15.519 29.845,15.519 29.642,15.723
  pour cut-out: 41.854,6.401 41.854,3.124 41.879,3.099 44.876,3.099 44.876,6.35 44.927,6.401
  pour cut-out: 29.007,6.401 29.007,3.124 29.032,3.099 32.029,3.099 32.029,6.35 32.08,6.401
  region net VCC3.3: 48.641,59.792 49.022,60.071 49.276,60.071 49.276,58.547 49.022,58.547 48.641,58.928
  region net VCC3.3: 25.146,28.956
  region net VCC3.3: 38.735,32.766 38.1,32.131 38.1,31.877 40.259,31.877 39.37,32.766
Multi-Layer:
  pour cut-out: 0,56.515 3.81,56.515 5.969,58.674 5.969,62.298 5.901,62.23 0,62.23
  pour cut-out: 50.546,62.103 50.546,59.182 53.213,56.515 56.515,56.515 56.515,62.103
  pour cut-out: 50.546,0.254 50.546,2.921 50.8,3.175 50.927,3.048 54.737,3.048 54.737,0.254
  pour cut-out: 0,5.715 6.147,5.715 6.223,5.791 6.223,0 0,0

## Silkscreen, mask and mechanical layers (free items; w line width, h text height)
Top Overlay:
  rectangle: 52.451,11.43 54.864,12.319
  rectangle: 54.926,9.082 56.134,11.43
  lines w0.254: 10.643,8.865 11.887,8.865 12.217,9.195 13.766,9.195 ; 20.676,25.298 21.514,25.298 ; 21.057,24.917 21.057,25.806
  text "5V" at 6.35,61.341 h0.89 r270
  text "JTAG/SWD" at 35.687,60.325 h1.52
  text "GND" at 6.35,59.45 h0.89 r270
  text "RX1" at 6.35,56.374 h0.89 r270
  text "UART3" at 4.445,56.261 h1.68 r270
  text "TX1" at 6.35,53.594 h0.89 r270
  text "GND" at 20.396,50.851 h0.89
  text "VCC" at 23.317,50.851 h0.89
  text "D0" at 26.34,50.851 h0.89
  text "D1" at 28.981,50.851 h0.89
  text "RES" at 30.861,50.851 h0.89
  text "DC" at 33.909,50.851 h0.89
  text "CS" at 36.271,50.851 h0.89
  text "GND" at 45.136,49.251 h0.76
  text "GND" at 47.473,49.251 h0.76
  text "PB12" at 6.985,49.149 h0.76
  text "PB13" at 10.16,49.149 h0.76
  text "PB14" at 6.985,46.736 h0.76
  text "PB15" at 10.16,46.736 h0.76
  text "BT1" at 45.161,46.711 h0.76
  text "BT0" at 47.447,46.685 h0.76
  text "OLED" at 25.425,46.279 h1.52
  text "PC6" at 6.985,44.094 h0.76
  text "PC7" at 9.906,44.094 h0.76
  text "3V3" at 44.831,44.069 h0.76
  text "3V3" at 47.498,44.069 h0.76
  text "STM32F103RC" at 32.766,41.783 h1.02
  text "PC8" at 6.934,41.656 h0.76
  text "PC9" at 9.855,41.631 h0.76
  text "PB11" at 44.069,41.529 h0.76
  text "PB10" at 46.863,41.529 h0.76
  text "PA8" at 6.909,39.116 h0.76
  text "PA9" at 9.83,39.116 h0.76
  text "PB1" at 44.45,39.04 h0.76
  text "PB0" at 47.066,39.014 h0.76
  text "PC5" at 44.628,36.5 h0.76
  text "PC4" at 47.193,36.5 h0.76
  text "PA10" at 6.909,36.474 h0.76
  text "PA13" at 10.414,36.449 h0.76
  text "PA7" at 44.679,34.011 h0.76
  text "PA6" at 47.219,34.011 h0.76
  text "PA14" at 6.96,33.858 h0.76
  text "PA15" at 10.414,33.782 h0.76
  text "PA5" at 44.78,31.623 h0.76
  text "PA4" at 47.295,31.572 h0.76
  text "PC11" at 10.033,31.471 h0.76
  text "PC10" at 6.96,31.394 h0.76
  text "PC12" at 6.985,28.981 h0.76
  text "PD2" at 10.16,28.956 h0.76
  text "PA3" at 44.856,28.956 h0.76
  text "PA2" at 47.447,28.905 h0.76
  text "PB4" at 9.779,26.67 h0.76
  text "PA1" at 45.085,26.67 h0.76
  text "PA0" at 47.371,26.543 h0.76
  text "PB3" at 7.087,26.518 h0.76
  text "AMS-3.3V" at 15.392,26.137 h0.64 r270
  text "32.768KHz" at 29.591,24.943 h0.64 r270
  text "PB5" at 7.112,23.876 h0.76
  text "PB6" at 9.652,23.876 h0.76
  text "PC3" at 46.609,23.749 h0.76 r45
  text "PC2" at 48.133,23.622 h0.76 r45
  text "8MHz" at 37.871,21.844 h0.64
  text "PB7" at 7.112,21.336 h0.76
  text "PB8" at 9.652,21.336 h0.76
  text "PC1" at 47.117,21.336 h0.76 r45
  text "PC0" at 48.133,20.701 h0.76 r45
  text "GND" at 8.509,20.091 h0.76 r315
  text "PB9" at 7.112,19.431 h0.76 r315
  text "PC13" at 43.942,18.542 h0.76
  text "GND" at 47.371,18.542 h0.76
  text "GND" at 7.976,17.12 h0.76 r315
  text "PA11" at 6.858,16.383 h0.76 r315
  text "PC14" at 43.942,16.256 h0.76
  text "GND" at 47.371,16.129 h0.76
  text "PA12" at 7.112,13.462 h0.76
  text "5V" at 10.668,13.462 h0.76
  text "PC15" at 44.069,13.335 h0.76
  text "3V3" at 47.371,13.335 h0.76
  text "FLASH" at 39.204,10.922 h1.52
  text "NRF2401" at 44.628,4.724 h1.52
Bottom Overlay:
  text "JTCK" at 30.277,9.068 h0.76 r90
  text "JTMS" at 31.547,9.068 h0.76 r90
  text "GND" at 40.945,8.331 h0.76 r90
  text "TXD" at 42.215,8.331 h0.76 r90
  text "RXD" at 43.485,8.331 h0.76 r90
  text "3V3" at 44.755,8.331 h0.76 r90
  text "GND" at 29.007,8.306 h0.76 r90
  text "3V3" at 32.817,8.306 h0.76 r90

## Dimensions
0,2.635 to 56.515,2.409 on Top Overlay
54.102,62.298 to 53.873,0 on Top Overlay